# Altium PCB PCB1.PcbDoc
Units mm, origin at the board's own origin, x right, y up, seen from the top; angles counter-clockwise.
Board outline 86 x 56 mm, 2 copper layers (Top Side, Bottom Layer), stack 1.771 mm thick; 1 components, 52 nets, 636 pads, 1 vias.
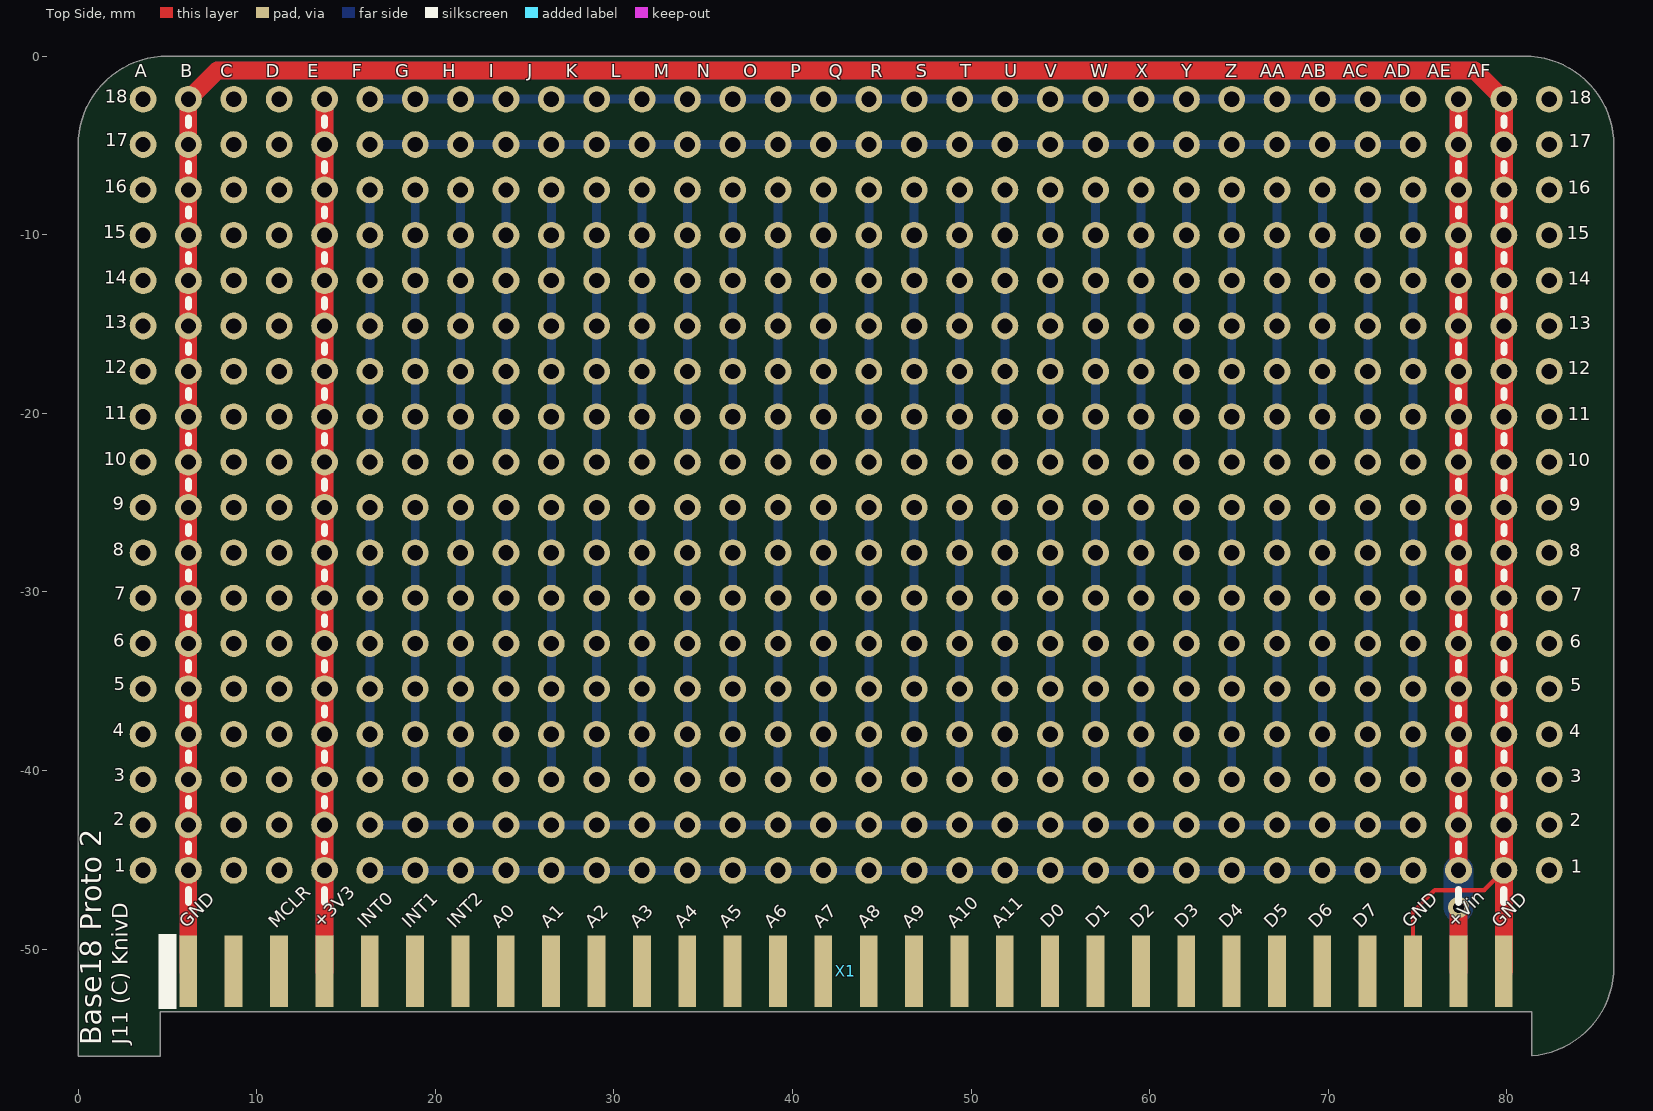
[diagram p0: Top Side view]
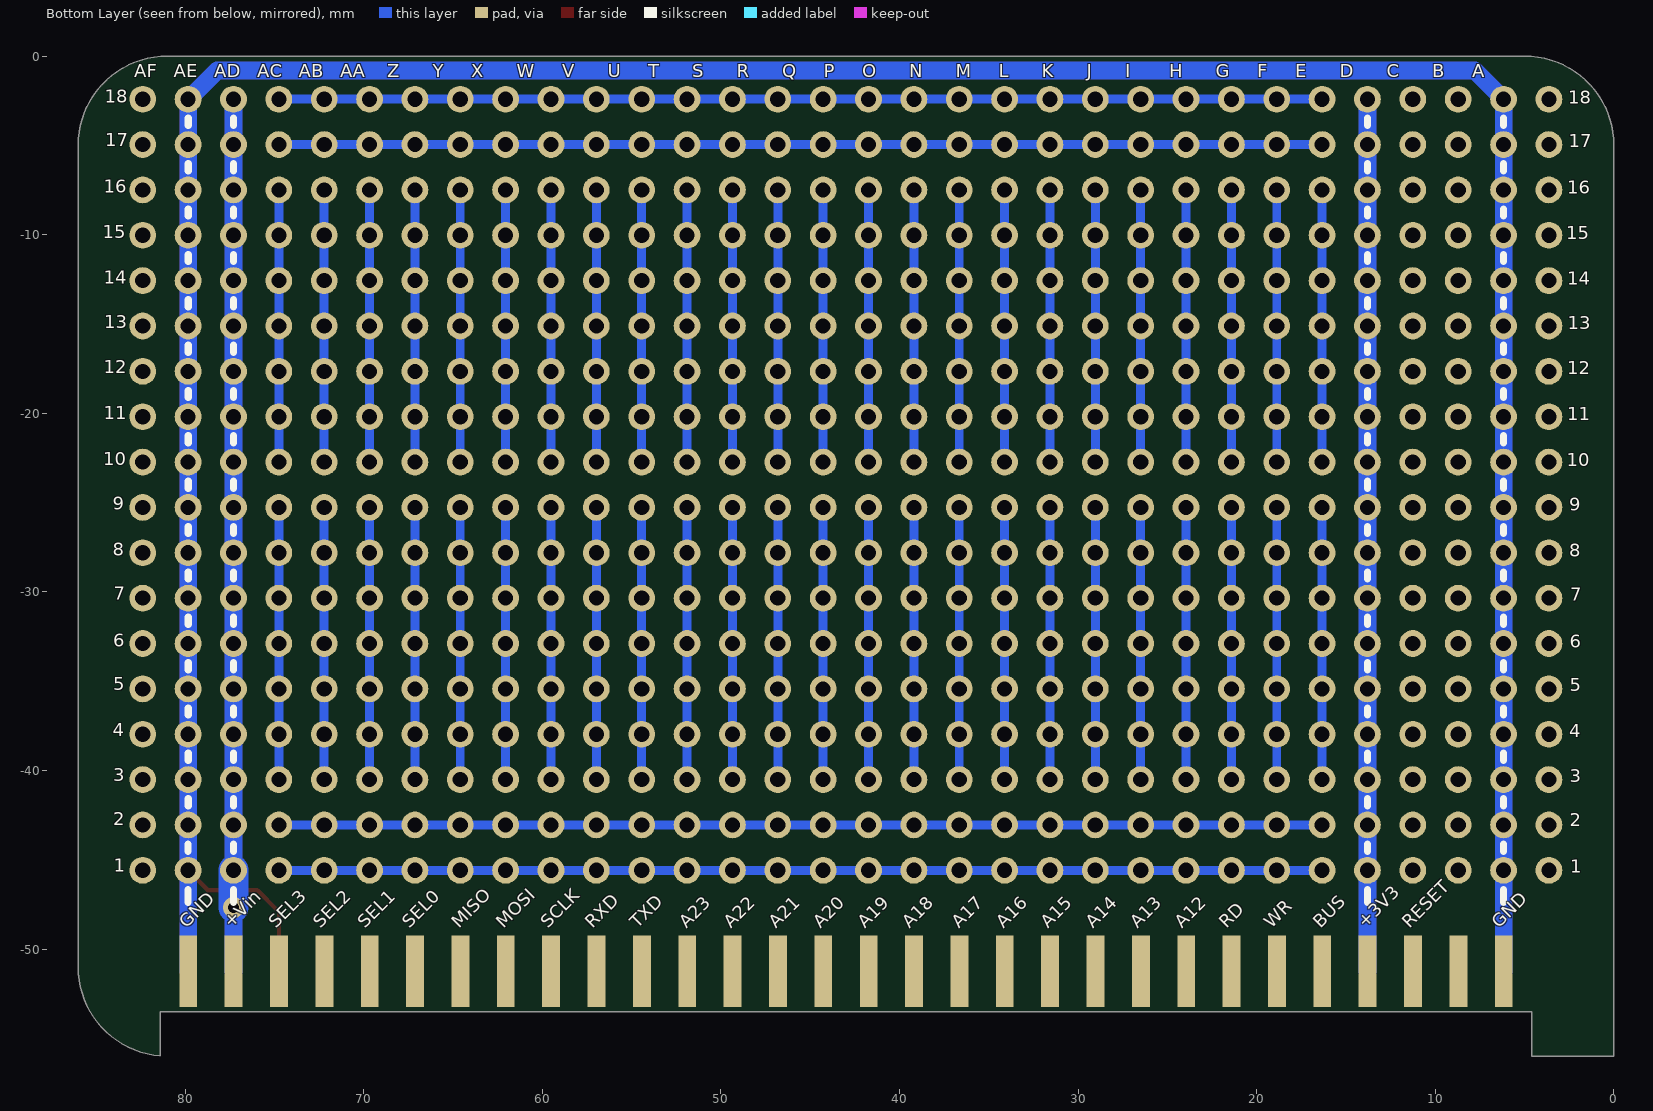
[diagram p1: Bottom Layer view, seen from below]

## Layer stack, top to bottom
Top Solder: solder mask 0.0102, Solder Resist, Dk 3.5
Top Side: signal copper 0.0356
Dielectric 1: core 1.7, FR-4, Dk 4.2
Bottom Layer: signal copper 0.0356
Solder Side: solder mask 0.0102, Solder Resist, Dk 3.5

## Board outline
0,-56 0,-5 cw(c5,-5) 5,0 81,0 cw(c81,-5) 86,-5 86,-51 cw(c81,-51) 81.399,-55.984 81.4,-55.984 81.4,-53.5 4.6,-53.5 4.6,-56

## Design rules (kind name [scope] priority, off if disabled: settings)
Clearance Clearance_Pour [IsRegion] p1: gap=0.3 ignorepadtopadclearanceinfootprint=TRUE
Clearance [All] p2: gap=0.2 ignorepadtopadclearanceinfootprint=TRUE
Height [All] p1: minheight=0 maxheight=100 prefheight=12.7
HoleSize [All] p1: absolutevalues=TRUE maxlimit=5 minlimit=0.025 maxpercent=80.000 minpercent=20.000
HoleToHoleClearance [All] p1: gap=0 allowstackedmicrovias=TRUE
MinimumSolderMaskSliver [All] p1: minsoldermaskwidth=0
PolygonConnect [All] p1: thpad.connectstyle=Relief thpad.reliefconductorwidth=0.25 thpad.reliefentries=4 thpad.polygonreliefangle="90 Angle" thpad.airgapwidth=0.25 smdpad.connectstyle=Relief smdpad.reliefconductorwidth=0.25 smdpad.reliefentries=4 smdpad.polygonreliefangle="90 Angle" smdpad.airgapwidth=0.25 via.connectstyle=Direct via.reliefconductorwidth=0.254 via.reliefentries=4 via.polygonreliefangle="45 Angle" via.airgapwidth=0.254
RoutingVias [All] p1: holewidth=0.3 width=0.6 viastyle="Through Hole" minholewidth=0.25 minwidth=0.5 maxholewidth=1.5 maxwidth=3
SilkToSilkClearance [All] p1: silktosilkclearance=-10
SilkToSolderMaskClearance [IsPad] p1: minsilkscreentomaskgap=-10 clearancetoexposedcopper=TRUE
SolderMaskExpansion SolderMaskExpansion_VIA [IsVia] p1: expansion=-0.3 soldermaskfromhole=TRUE
SolderMaskExpansion [All] p2: expansion=0.102
Width [All] p1: maxlimit=10 minlimit=0.2 preferedwidth=0.25
24 further rules are at their usual default settings.

## Components (designator, comment, footprint, x,y, rotation, side; value= is the part's Value field where it differs from the comment)
X1 "TSW-130-07-G-D" DIL60-M-EDGE 43,-50.45 r0 top locked

## Footprints (in the part's own frame and the unit in brackets; to place one, negate y for a bottom-side part, rotate by r counter-clockwise, add the part's x,y. Pads: shape width x height; smd on the part's side, far side on the other; paste and mask are expansions set on the pad)
DIL60-M-EDGE [mm] "DIL60 header soldered as edge connector"
  rect 1x4 smd: 1(-36.83,-0.8) 3(-34.29,-0.8) 5(-31.75,-0.8) 7(-29.21,-0.8) 9(-26.67,-0.8) 11(-24.13,-0.8) 13(-21.59,-0.8) 15(-19.05,-0.8) 17(-16.51,-0.8) 19(-13.97,-0.8) 21(-11.43,-0.8) 23(-8.89,-0.8) 25(-6.35,-0.8) 27(-3.81,-0.8) 29(-1.27,-0.8) 31(1.27,-0.8) 33(3.81,-0.8) 35(6.35,-0.8) 37(8.89,-0.8) 39(11.43,-0.8) 41(13.97,-0.8) 43(16.51,-0.8) 45(19.05,-0.8) 47(21.59,-0.8) 49(24.13,-0.8) 51(26.67,-0.8) 53(29.21,-0.8) 55(31.75,-0.8) 57(34.29,-0.8) 59(36.83,-0.8)
  rect 1x4 smd far side: 2(-36.83,-0.8) 4(-34.29,-0.8) 6(-31.75,-0.8) 8(-29.21,-0.8) 10(-26.67,-0.8) 12(-24.13,-0.8) 14(-21.59,-0.8) 16(-19.05,-0.8) 18(-16.51,-0.8) 20(-13.97,-0.8) 22(-11.43,-0.8) 24(-8.89,-0.8) 26(-6.35,-0.8) 28(-3.81,-0.8) 30(-1.27,-0.8) 32(1.27,-0.8) 34(3.81,-0.8) 36(6.35,-0.8) 38(8.89,-0.8) 40(11.43,-0.8) 42(13.97,-0.8) 44(16.51,-0.8) 46(19.05,-0.8) 48(21.59,-0.8) 50(24.13,-0.8) 52(26.67,-0.8) 54(29.21,-0.8) 56(31.75,-0.8) 58(34.29,-0.8) 60(36.83,-0.8)
  silkscreen extent -38.5,-2.9 -37.5,1.3, body extent -38.1,-10.83 38.1,0.09, height 1.64

## Part data
X1: library part "Connector 2x30", "Dual row, 60-way connector"

## Free pads (board coordinates)
  round 1.5 hole 0.85 unplated: 0(3.64,-45.593) 0(3.64,-43.053) 0(3.64,-40.513) 0(3.64,-37.973) 0(3.64,-35.433) 0(3.64,-32.893) 0(3.64,-30.353) 0(3.64,-27.813) 0(3.64,-25.273) 0(3.64,-22.733) 0(3.64,-20.193) 0(3.64,-17.653) 0(3.64,-15.113) 0(3.64,-12.573) 0(3.64,-10.033) 0(3.64,-7.493) 0(3.64,-4.953) 0(3.64,-2.413) 0(6.18,-45.593) 0(6.18,-43.053) 0(6.18,-40.513) 0(6.18,-37.973) 0(6.18,-35.433) 0(6.18,-32.893) 0(6.18,-30.353) 0(6.18,-27.813) 0(6.18,-25.273) 0(6.18,-22.733) 0(6.18,-20.193) 0(6.18,-17.653) 0(6.18,-15.113) 0(6.18,-12.573) 0(6.18,-10.033) 0(6.18,-7.493) 0(6.18,-4.953) 0(6.18,-2.413) 0(8.72,-45.593) 0(8.72,-43.053) 0(8.72,-40.513) 0(8.72,-37.973) 0(8.72,-35.433) 0(8.72,-32.893) 0(8.72,-30.353) 0(8.72,-27.813) 0(8.72,-25.273) 0(8.72,-22.733) 0(8.72,-20.193) 0(8.72,-17.653) 0(8.72,-15.113) 0(8.72,-12.573) 0(8.72,-10.033) 0(8.72,-7.493) 0(8.72,-4.953) 0(8.72,-2.413) 0(11.26,-45.593) 0(11.26,-43.053) 0(11.26,-40.513) 0(11.26,-37.973) 0(11.26,-35.433) 0(11.26,-32.893) 0(11.26,-30.353) 0(11.26,-27.813) 0(11.26,-25.273) 0(11.26,-22.733) 0(11.26,-20.193) 0(11.26,-17.653) 0(11.26,-15.113) 0(11.26,-12.573) 0(11.26,-10.033) 0(11.26,-7.493) 0(11.26,-4.953) 0(11.26,-2.413) 0(13.8,-45.593) 0(13.8,-43.053) 0(13.8,-40.513) 0(13.8,-37.973) 0(13.8,-35.433) 0(13.8,-32.893) 0(13.8,-30.353) 0(13.8,-27.813) 0(13.8,-25.273) 0(13.8,-22.733) 0(13.8,-20.193) 0(13.8,-17.653) 0(13.8,-15.113) 0(13.8,-12.573) 0(13.8,-10.033) 0(13.8,-7.493) 0(13.8,-4.953) 0(13.8,-2.413) 0(16.34,-45.593) 0(16.34,-43.053) 0(16.34,-40.513) 0(16.34,-37.973) 0(16.34,-35.433) 0(16.34,-32.893) 0(16.34,-30.353) 0(16.34,-27.813) 0(16.34,-25.273) 0(16.34,-22.733) 0(16.34,-20.193) 0(16.34,-17.653) 0(16.34,-15.113) 0(16.34,-12.573) 0(16.34,-10.033) 0(16.34,-7.493) 0(16.34,-4.953) 0(16.34,-2.413) 0(18.88,-45.593) 0(18.88,-43.053) 0(18.88,-40.513) 0(18.88,-37.973) 0(18.88,-35.433) 0(18.88,-32.893) 0(18.88,-30.353) 0(18.88,-27.813) 0(18.88,-25.273) 0(18.88,-22.733) 0(18.88,-20.193) 0(18.88,-17.653) 0(18.88,-15.113) 0(18.88,-12.573) 0(18.88,-10.033) 0(18.88,-7.493) 0(18.88,-4.953) 0(18.88,-2.413) 0(21.42,-45.593) 0(21.42,-43.053) 0(21.42,-40.513) 0(21.42,-37.973) 0(21.42,-35.433) 0(21.42,-32.893) 0(21.42,-30.353) 0(21.42,-27.813) 0(21.42,-25.273) 0(21.42,-22.733) 0(21.42,-20.193) 0(21.42,-17.653) 0(21.42,-15.113) 0(21.42,-12.573) 0(21.42,-10.033) 0(21.42,-7.493) 0(21.42,-4.953) 0(21.42,-2.413) 0(23.96,-45.593) 0(23.96,-43.053) 0(23.96,-40.513) 0(23.96,-37.973) 0(23.96,-35.433) 0(23.96,-32.893) 0(23.96,-30.353) 0(23.96,-27.813) 0(23.96,-25.273) 0(23.96,-22.733) 0(23.96,-20.193) 0(23.96,-17.653) 0(23.96,-15.113) 0(23.96,-12.573) 0(23.96,-10.033) 0(23.96,-7.493) 0(23.96,-4.953) 0(23.96,-2.413) 0(26.5,-45.593) 0(26.5,-43.053) 0(26.5,-40.513) 0(26.5,-37.973) 0(26.5,-35.433) 0(26.5,-32.893) 0(26.5,-30.353) 0(26.5,-27.813) 0(26.5,-25.273) 0(26.5,-22.733) 0(26.5,-20.193) 0(26.5,-17.653) 0(26.5,-15.113) 0(26.5,-12.573) 0(26.5,-10.033) 0(26.5,-7.493) 0(26.5,-4.953) 0(26.5,-2.413) 0(29.04,-45.593) 0(29.04,-43.053) 0(29.04,-40.513) 0(29.04,-37.973) 0(29.04,-35.433) 0(29.04,-32.893) 0(29.04,-30.353) 0(29.04,-27.813) 0(29.04,-25.273) 0(29.04,-22.733) 0(29.04,-20.193) 0(29.04,-17.653) 0(29.04,-15.113) 0(29.04,-12.573) 0(29.04,-10.033) 0(29.04,-7.493) 0(29.04,-4.953) 0(29.04,-2.413) 0(31.58,-45.593) 0(31.58,-43.053) 0(31.58,-40.513) 0(31.58,-37.973) 0(31.58,-35.433) 0(31.58,-32.893) 0(31.58,-30.353) 0(31.58,-27.813) 0(31.58,-25.273) 0(31.58,-22.733) 0(31.58,-20.193) 0(31.58,-17.653) 0(31.58,-15.113) 0(31.58,-12.573) 0(31.58,-10.033) 0(31.58,-7.493) 0(31.58,-4.953) 0(31.58,-2.413) 0(34.12,-45.593) 0(34.12,-43.053) 0(34.12,-40.513) 0(34.12,-37.973) 0(34.12,-35.433) 0(34.12,-32.893) 0(34.12,-30.353) 0(34.12,-27.813) 0(34.12,-25.273) 0(34.12,-22.733) 0(34.12,-20.193) 0(34.12,-17.653) 0(34.12,-15.113) 0(34.12,-12.573) 0(34.12,-10.033) 0(34.12,-7.493) 0(34.12,-4.953) 0(34.12,-2.413) 0(36.66,-45.593) 0(36.66,-43.053) 0(36.66,-40.513) 0(36.66,-37.973) 0(36.66,-35.433) 0(36.66,-32.893) 0(36.66,-30.353) 0(36.66,-27.813) 0(36.66,-25.273) 0(36.66,-22.733) 0(36.66,-20.193) 0(36.66,-17.653) 0(36.66,-15.113) 0(36.66,-12.573) 0(36.66,-10.033) 0(36.66,-7.493) 0(36.66,-4.953) 0(36.66,-2.413) 0(39.2,-45.593) 0(39.2,-43.053) 0(39.2,-40.513) 0(39.2,-37.973) 0(39.2,-35.433) 0(39.2,-32.893) 0(39.2,-30.353) 0(39.2,-27.813) 0(39.2,-25.273) 0(39.2,-22.733) 0(39.2,-20.193) 0(39.2,-17.653) 0(39.2,-15.113) 0(39.2,-12.573) 0(39.2,-10.033) 0(39.2,-7.493) 0(39.2,-4.953) 0(39.2,-2.413) 0(41.74,-45.593) 0(41.74,-43.053) 0(41.74,-40.513) 0(41.74,-37.973) 0(41.74,-35.433) 0(41.74,-32.893) 0(41.74,-30.353) 0(41.74,-27.813) 0(41.74,-25.273) 0(41.74,-22.733) 0(41.74,-20.193) 0(41.74,-17.653) 0(41.74,-15.113) 0(41.74,-12.573) 0(41.74,-10.033) 0(41.74,-7.493) 0(41.74,-4.953) 0(41.74,-2.413) 0(44.28,-45.593) 0(44.28,-43.053) 0(44.28,-40.513) 0(44.28,-37.973) 0(44.28,-35.433) 0(44.28,-32.893) 0(44.28,-30.353) 0(44.28,-27.813) 0(44.28,-25.273) 0(44.28,-22.733) 0(44.28,-20.193) 0(44.28,-17.653) 0(44.28,-15.113) 0(44.28,-12.573) 0(44.28,-10.033) 0(44.28,-7.493) 0(44.28,-4.953) 0(44.28,-2.413) 0(46.82,-45.593) 0(46.82,-43.053) 0(46.82,-40.513) 0(46.82,-37.973) 0(46.82,-35.433) 0(46.82,-32.893) 0(46.82,-30.353) 0(46.82,-27.813) 0(46.82,-25.273) 0(46.82,-22.733) 0(46.82,-20.193) 0(46.82,-17.653) 0(46.82,-15.113) 0(46.82,-12.573) 0(46.82,-10.033) 0(46.82,-7.493) 0(46.82,-4.953) 0(46.82,-2.413) 0(49.36,-45.593) 0(49.36,-43.053) 0(49.36,-40.513) 0(49.36,-37.973) 0(49.36,-35.433) 0(49.36,-32.893) 0(49.36,-30.353) 0(49.36,-27.813) 0(49.36,-25.273) 0(49.36,-22.733) 0(49.36,-20.193) 0(49.36,-17.653) 0(49.36,-15.113) 0(49.36,-12.573) 0(49.36,-10.033) 0(49.36,-7.493) 0(49.36,-4.953) 0(49.36,-2.413) 0(51.9,-45.593) 0(51.9,-43.053) 0(51.9,-40.513) 0(51.9,-37.973) 0(51.9,-35.433) 0(51.9,-32.893) 0(51.9,-30.353) 0(51.9,-27.813) 0(51.9,-25.273) 0(51.9,-22.733) 0(51.9,-20.193) 0(51.9,-17.653) 0(51.9,-15.113) 0(51.9,-12.573) 0(51.9,-10.033) 0(51.9,-7.493) 0(51.9,-4.953) 0(51.9,-2.413) 0(54.44,-45.593) 0(54.44,-43.053) 0(54.44,-40.513) 0(54.44,-37.973) 0(54.44,-35.433) 0(54.44,-32.893) 0(54.44,-30.353) 0(54.44,-27.813) 0(54.44,-25.273) 0(54.44,-22.733) 0(54.44,-20.193) 0(54.44,-17.653) 0(54.44,-15.113) 0(54.44,-12.573) 0(54.44,-10.033) 0(54.44,-7.493) 0(54.44,-4.953) 0(54.44,-2.413) 0(56.98,-45.593) 0(56.98,-43.053) 0(56.98,-40.513) 0(56.98,-37.973) 0(56.98,-35.433) 0(56.98,-32.893) 0(56.98,-30.353) 0(56.98,-27.813) 0(56.98,-25.273) 0(56.98,-22.733) 0(56.98,-20.193) 0(56.98,-17.653) 0(56.98,-15.113) 0(56.98,-12.573) 0(56.98,-10.033) 0(56.98,-7.493) 0(56.98,-4.953) 0(56.98,-2.413) 0(59.52,-45.593) 0(59.52,-43.053) 0(59.52,-40.513) 0(59.52,-37.973) 0(59.52,-35.433) 0(59.52,-32.893) 0(59.52,-30.353) 0(59.52,-27.813) 0(59.52,-25.273) 0(59.52,-22.733) 0(59.52,-20.193) 0(59.52,-17.653) 0(59.52,-15.113) 0(59.52,-12.573) 0(59.52,-10.033) 0(59.52,-7.493) 0(59.52,-4.953) 0(59.52,-2.413) 0(62.06,-45.593) 0(62.06,-43.053) 0(62.06,-40.513) 0(62.06,-37.973) 0(62.06,-35.433) 0(62.06,-32.893) 0(62.06,-30.353) 0(62.06,-27.813) 0(62.06,-25.273) 0(62.06,-22.733) 0(62.06,-20.193) 0(62.06,-17.653) 0(62.06,-15.113) 0(62.06,-12.573) 0(62.06,-10.033) 0(62.06,-7.493) 0(62.06,-4.953) 0(62.06,-2.413) 0(64.6,-45.593) 0(64.6,-43.053) 0(64.6,-40.513) 0(64.6,-37.973) 0(64.6,-35.433) 0(64.6,-32.893) 0(64.6,-30.353) 0(64.6,-27.813) 0(64.6,-25.273) 0(64.6,-22.733) 0(64.6,-20.193) 0(64.6,-17.653) 0(64.6,-15.113) 0(64.6,-12.573) 0(64.6,-10.033) 0(64.6,-7.493) 0(64.6,-4.953) 0(64.6,-2.413) 0(67.14,-45.593) 0(67.14,-43.053) 0(67.14,-40.513) 0(67.14,-37.973) 0(67.14,-35.433) 0(67.14,-32.893) 0(67.14,-30.353) 0(67.14,-27.813) 0(67.14,-25.273) 0(67.14,-22.733) 0(67.14,-20.193) 0(67.14,-17.653) 0(67.14,-15.113) 0(67.14,-12.573) 0(67.14,-10.033) 0(67.14,-7.493) 0(67.14,-4.953) 0(67.14,-2.413) 0(69.68,-45.593) 0(69.68,-43.053) 0(69.68,-40.513) 0(69.68,-37.973) 0(69.68,-35.433) 0(69.68,-32.893) 0(69.68,-30.353) 0(69.68,-27.813) 0(69.68,-25.273) 0(69.68,-22.733) 0(69.68,-20.193) 0(69.68,-17.653) 0(69.68,-15.113) 0(69.68,-12.573) 0(69.68,-10.033) 0(69.68,-7.493) 0(69.68,-4.953) 0(69.68,-2.413) 0(72.22,-45.593) 0(72.22,-43.053) 0(72.22,-40.513) 0(72.22,-37.973) 0(72.22,-35.433) 0(72.22,-32.893) 0(72.22,-30.353) 0(72.22,-27.813) 0(72.22,-25.273) 0(72.22,-22.733) 0(72.22,-20.193) 0(72.22,-17.653) 0(72.22,-15.113) 0(72.22,-12.573) 0(72.22,-10.033) 0(72.22,-7.493) 0(72.22,-4.953) 0(72.22,-2.413) 0(74.76,-45.593) 0(74.76,-43.053) 0(74.76,-40.513) 0(74.76,-37.973) 0(74.76,-35.433) 0(74.76,-32.893) 0(74.76,-30.353) 0(74.76,-27.813) 0(74.76,-25.273) 0(74.76,-22.733) 0(74.76,-20.193) 0(74.76,-17.653) 0(74.76,-15.113) 0(74.76,-12.573) 0(74.76,-10.033) 0(74.76,-7.493) 0(74.76,-4.953) 0(74.76,-2.413) 0(77.3,-45.593) 0(77.3,-43.053) 0(77.3,-40.513) 0(77.3,-37.973) 0(77.3,-35.433) 0(77.3,-32.893) 0(77.3,-30.353) 0(77.3,-27.813) 0(77.3,-25.273) 0(77.3,-22.733) 0(77.3,-20.193) 0(77.3,-17.653) 0(77.3,-15.113) 0(77.3,-12.573) 0(77.3,-10.033) 0(77.3,-7.493) 0(77.3,-4.953) 0(77.3,-2.413) 0(79.84,-45.593) 0(79.84,-43.053) 0(79.84,-40.513) 0(79.84,-37.973) 0(79.84,-35.433) 0(79.84,-32.893) 0(79.84,-30.353) 0(79.84,-27.813) 0(79.84,-25.273) 0(79.84,-22.733) 0(79.84,-20.193) 0(79.84,-17.653) 0(79.84,-15.113) 0(79.84,-12.573) 0(79.84,-10.033) 0(79.84,-7.493) 0(79.84,-4.953) 0(79.84,-2.413) 0(82.38,-45.593) 0(82.38,-43.053) 0(82.38,-40.513) 0(82.38,-37.973) 0(82.38,-35.433) 0(82.38,-32.893) 0(82.38,-30.353) 0(82.38,-27.813) 0(82.38,-25.273) 0(82.38,-22.733) 0(82.38,-20.193) 0(82.38,-17.653) 0(82.38,-15.113) 0(82.38,-12.573) 0(82.38,-10.033) 0(82.38,-7.493) 0(82.38,-4.953) 0(82.38,-2.413)

## Via types
v1: diameter 1.2, hole 0.6, Top Side to Bottom Layer, tented both sides, 1 vias

## Nets (pads, with @x,y where several pads share a name; then routed paths per layer and width w, separated by ;. In a path a pad name is that pad's centre, name@x,y a point inside that pad or via, vN(x,y) a via of type N, cw(c..) or ccw(c..) an arc to the next point about the centre after c; other vN are vias at no path point)
+3V3: pad.0@13.8,-2.413 pad.0@13.8,-4.953 pad.0@13.8,-7.493 pad.0@13.8,-10.033 pad.0@13.8,-12.573 pad.0@13.8,-15.113 pad.0@13.8,-17.653 pad.0@13.8,-20.193 pad.0@13.8,-22.733 pad.0@13.8,-25.273 pad.0@13.8,-27.813 pad.0@13.8,-30.353 pad.0@13.8,-32.893 pad.0@13.8,-35.433 pad.0@13.8,-37.973 pad.0@13.8,-40.513 pad.0@13.8,-43.053 pad.0@13.8,-45.593 X1.7 X1.8 | length 97.7
  Top Side w1: X1.7 13.79,-2.423 pad.0@13.8,-2.413
  Bottom Layer w1: X1.8 13.79,-2.423 pad.0@13.8,-2.413
+Vin: pad.0@77.3,-2.413 pad.0@77.3,-4.953 pad.0@77.3,-7.493 pad.0@77.3,-10.033 pad.0@77.3,-12.573 pad.0@77.3,-15.113 pad.0@77.3,-17.653 pad.0@77.3,-20.193 pad.0@77.3,-22.733 pad.0@77.3,-25.273 pad.0@77.3,-27.813 pad.0@77.3,-30.353 pad.0@77.3,-32.893 pad.0@77.3,-35.433 pad.0@77.3,-37.973 pad.0@77.3,-40.513 pad.0@77.3,-43.053 pad.0@77.3,-45.593 X1.57 X1.58 | length 95.6
  Top Side w1: X1.57 77.3,-51.24 v1(77.3,-47.675) ; pad.0@77.29,-45.593 77.29,-2.423 pad.0@77.3,-2.413
  Bottom Layer w1: X1.58 77.3,-51.24 v1(77.3,-47.675) ; pad.0@77.3,-45.593 77.3,-43.053 77.3,-40.513 77.3,-37.973 77.3,-35.433 77.3,-32.893 77.3,-30.353 77.3,-27.813 77.3,-25.273 77.3,-22.733 77.3,-20.193 77.3,-17.653 77.3,-15.113 77.3,-12.573 77.3,-10.033 77.3,-7.493 77.3,-4.953 pad.0@77.3,-2.413
  Bottom Layer w1.7: v1(77.3,-47.675) pad.0@77.3,-45.593
A00: X1.15
A01: X1.17
A02: X1.19
A03: X1.21
A04: X1.23
A05: X1.25
A06: X1.27
A07: X1.29
A08: X1.31
A09: X1.33
A10: X1.35
A11: X1.37
A12: X1.16
A13: X1.18
A14: X1.20
A15: X1.22
A16: X1.24
A17: X1.26
A18: X1.28
A19: X1.30
A20: X1.32
A21: X1.34
A22: X1.36
A23: X1.38
BUS#: X1.10
DB0: X1.39
DB1: X1.41
DB2: X1.43
DB3: X1.45
DB4: X1.47
DB5: X1.49
DB6: X1.51
DB7: X1.53
GND: pad.0@6.18,-2.413 pad.0@6.18,-4.953 pad.0@6.18,-7.493 pad.0@6.18,-10.033 pad.0@6.18,-12.573 pad.0@6.18,-15.113 pad.0@6.18,-17.653 pad.0@6.18,-20.193 pad.0@6.18,-22.733 pad.0@6.18,-25.273 pad.0@6.18,-27.813 pad.0@6.18,-30.353 pad.0@6.18,-32.893 pad.0@6.18,-35.433 pad.0@6.18,-37.973 pad.0@6.18,-40.513 pad.0@6.18,-43.053 pad.0@6.18,-45.593 pad.0@79.84,-2.413 pad.0@79.84,-4.953 pad.0@79.84,-7.493 pad.0@79.84,-10.033 pad.0@79.84,-12.573 pad.0@79.84,-15.113 pad.0@79.84,-17.653 pad.0@79.84,-20.193 pad.0@79.84,-22.733 pad.0@79.84,-25.273 pad.0@79.84,-27.813 pad.0@79.84,-30.353 pad.0@79.84,-32.893 pad.0@79.84,-35.433 pad.0@79.84,-37.973 pad.0@79.84,-40.513 pad.0@79.84,-43.053 pad.0@79.84,-45.593 X1.1 X1.2 X1.55 X1.59 X1.60 | length 354.7
  Top Side w0.25: X1.55 74.75,-47.925 75.975,-46.7 78.733,-46.7 pad.0@79.84,-45.593
  Top Side w1: X1.1 6.17,-2.423 6.18,-2.413 7.793,-0.8 78.207,-0.8 79.82,-2.413 79.84,-2.413 79.84,-4.953 79.84,-7.493 79.84,-10.033 79.84,-12.573 79.84,-15.113 79.84,-17.653 79.84,-20.193 79.84,-22.733 79.84,-25.273 79.84,-27.813 79.84,-30.353 79.84,-32.893 79.84,-35.433 79.84,-37.973 79.84,-40.513 79.84,-43.053 79.84,-45.593 79.84,-51.24 X1.59
  Bottom Layer w1: X1.2 6.17,-2.423 6.18,-2.413 7.793,-0.8 78.207,-0.8 pad.0@79.83,-2.423 ; X1.60 pad.0@79.83,-2.423 ; pad.0@79.84,-2.413 pad.0@79.83,-2.423
INT0#: X1.9
INT1#: X1.11
INT2#: X1.13
MCLR#: X1.5
MISO: X1.48
MOSI: X1.46
RD#: X1.14
RESET#: X1.6
RXD: X1.42
SCLK: X1.44
SEL0#: X1.50
SEL1#: X1.52
SEL2#: X1.54
SEL3#: X1.56
TXD: X1.40
WR#: X1.12
pads on no net: X1.3 X1.4
copper on no net: | length 965.2
  Bottom Layer w0.5: 16.34,-45.593 74.76,-45.593 ; 16.34,-43.053 74.76,-43.053 ; 16.34,-40.513 16.34,-25.273 ; 16.34,-22.733 16.34,-7.493 ; 16.34,-4.953 74.76,-4.953 ; 16.34,-2.413 74.76,-2.413 ; 18.88,-40.513 18.88,-25.273 ; 18.88,-22.733 18.88,-7.493 ; 21.42,-40.513 21.42,-25.273 ; 21.42,-22.733 21.42,-7.493 ; 23.96,-40.513 23.96,-25.273 ; 23.96,-22.733 23.96,-7.493 ; 26.5,-40.513 26.5,-25.273 ; 26.5,-22.733 26.5,-7.493 ; 29.04,-40.513 29.04,-25.273 ; 29.04,-22.733 29.04,-7.493 ; 31.58,-40.513 31.58,-25.273 ; 31.58,-22.733 31.58,-7.493 ; 34.12,-40.513 34.12,-25.273 ; 34.12,-22.733 34.12,-7.493 ; 36.66,-40.513 36.66,-25.273 ; 36.66,-22.733 36.66,-7.493 ; 39.2,-40.513 39.2,-25.273 ; 39.2,-22.733 39.2,-7.493 ; 41.74,-40.513 41.74,-25.273 ; 41.74,-22.733 41.74,-7.493 ; 44.28,-40.513 44.28,-25.273 ; 44.28,-22.733 44.28,-7.493 ; 46.82,-40.513 46.82,-25.273 ; 46.82,-22.733 46.82,-7.493 ; 49.36,-40.513 49.36,-25.273 ; 49.36,-22.733 49.36,-7.493 ; 51.9,-40.513 51.9,-25.273 ; 51.9,-22.733 51.9,-7.493 ; 54.44,-40.513 54.44,-25.273 ; 54.44,-22.733 54.44,-7.493 ; 56.98,-40.513 56.98,-25.273 ; 56.98,-22.733 56.98,-7.493 ; 59.52,-40.513 59.52,-25.273 ; 59.52,-22.733 59.52,-7.493 ; 62.06,-40.513 62.06,-25.273 ; 62.06,-22.733 62.06,-7.493 ; 64.6,-40.513 64.6,-25.273 ; 64.6,-22.733 64.6,-7.493 ; 67.14,-40.513 67.14,-25.273 ; 67.14,-22.733 67.14,-7.493 ; 69.68,-40.513 69.68,-25.273 ; 69.68,-22.733 69.68,-7.493 ; 72.22,-40.513 72.22,-25.273 ; 72.22,-22.733 72.22,-7.493 ; 74.76,-40.513 74.76,-25.273 ; 74.76,-22.733 74.76,-7.493

## Silkscreen, mask and mechanical layers (free items; w line width, h text height)
Top Overlay:
  lines w0.4: 6.175,-47.4 6.175,-46.675 ; 6.175,-44.525 6.175,-44.125 ; 6.184,-41.981 6.184,-41.581 ; 6.184,-39.441 6.184,-39.041 ; 6.184,-36.901 6.184,-36.501 ; 6.184,-34.361 6.184,-33.961 ; 6.184,-31.821 6.184,-31.421 ; 6.184,-29.281 6.184,-28.881 ; 6.184,-26.741 6.184,-26.341 ; 6.184,-24.201 6.184,-23.801 ; 6.184,-21.661 6.184,-21.261 ; 6.184,-19.121 6.184,-18.721 ; 6.184,-16.581 6.184,-16.181 ; 6.184,-14.041 6.184,-13.641 ; 6.184,-11.501 6.184,-11.101 ; 6.184,-8.961 6.184,-8.561 ; 6.184,-6.421 6.184,-6.021 ; 6.184,-3.881 6.184,-3.481 ; 13.795,-47.4 13.795,-46.675 ; 13.795,-44.525 13.795,-44.125 ; 13.804,-41.981 13.804,-41.581 ; 13.804,-39.441 13.804,-39.041 ; 13.804,-36.901 13.804,-36.501 ; 13.804,-34.361 13.804,-33.961 ; 13.804,-31.821 13.804,-31.421 ; 13.804,-29.281 13.804,-28.881 ; 13.804,-26.741 13.804,-26.341 ; 13.804,-24.201 13.804,-23.801 ; 13.804,-21.661 13.804,-21.261 ; 13.804,-19.121 13.804,-18.721 ; 13.804,-16.581 13.804,-16.181 ; 13.804,-14.041 13.804,-13.641 ; 13.804,-11.501 13.804,-11.101 ; 13.804,-8.961 13.804,-8.561 ; 13.804,-6.421 13.804,-6.021 ; 13.804,-3.881 13.804,-3.481 ; 77.295,-47.4 77.295,-46.675 ; 77.295,-44.525 77.295,-44.125 ; 77.304,-41.981 77.304,-41.581 ; 77.304,-39.441 77.304,-39.041 ; 77.304,-36.901 77.304,-36.501 ; 77.304,-34.361 77.304,-33.961 ; 77.304,-31.821 77.304,-31.421 ; 77.304,-29.281 77.304,-28.881 ; 77.304,-26.741 77.304,-26.341 ; 77.304,-24.201 77.304,-23.801 ; 77.304,-21.661 77.304,-21.261 ; 77.304,-19.121 77.304,-18.721 ; 77.304,-16.581 77.304,-16.181 ; 77.304,-14.041 77.304,-13.641 ; 77.304,-11.501 77.304,-11.101 ; 77.304,-8.961 77.304,-8.561 ; 77.304,-6.421 77.304,-6.021 ; 77.304,-3.881 77.304,-3.481 ; 79.835,-47.4 79.835,-46.675 ; 79.835,-44.525 79.835,-44.125 ; 79.844,-41.981 79.844,-41.581 ; 79.844,-39.441 79.844,-39.041 ; 79.844,-36.901 79.844,-36.501 ; 79.844,-34.361 79.844,-33.961 ; 79.844,-31.821 79.844,-31.421 ; 79.844,-29.281 79.844,-28.881 ; 79.844,-26.741 79.844,-26.341 ; 79.844,-24.201 79.844,-23.801 ; 79.844,-21.661 79.844,-21.261 ; 79.844,-19.121 79.844,-18.721 ; 79.844,-16.581 79.844,-16.181 ; 79.844,-14.041 79.844,-13.641 ; 79.844,-11.501 79.844,-11.101 ; 79.844,-8.961 79.844,-8.561 ; 79.844,-6.421 79.844,-6.021 ; 79.844,-3.881 79.844,-3.481
  text "A      B     C      D     E      F      G      H      I      J      K      L      M     N      O      P     Q     R      S      T      U     V      W     X      Y      Z    AA   AB   AC   AD   AE   AF" at 3.175,-1.425 h1.25
  text "18" at 1.5,-2.85 h1.25
  text "18" at 83.46,-2.907 h1.25
  text "17" at 1.525,-5.3 h1.25
  text "17" at 83.485,-5.357 h1.25
  text "16" at 1.45,-7.9 h1.25
  text "16" at 83.41,-7.957 h1.25
  text "15" at 1.4,-10.45 h1.25
  text "15" at 83.36,-10.507 h1.25
  text "14" at 1.45,-13 h1.25
  text "14" at 83.41,-13.057 h1.25
  text "13" at 1.475,-15.5 h1.25
  text "13" at 83.435,-15.557 h1.25
  text "12" at 1.45,-18 h1.25
  text "12" at 83.41,-18.057 h1.25
  text "11" at 1.45,-20.575 h1.25
  text "11" at 83.41,-20.632 h1.25
  text "10" at 1.425,-23.15 h1.25
  text "10" at 83.385,-23.207 h1.25
  text "9" at 1.95,-25.65 h1.25
  text "9" at 83.51,-25.707 h1.25
  text "8" at 1.95,-28.225 h1.25
  text "8" at 83.51,-28.282 h1.25
  text "7" at 2.025,-30.7 h1.25
  text "7" at 83.585,-30.757 h1.25
  text "6" at 1.975,-33.325 h1.25
  text "6" at 83.535,-33.382 h1.25
  text "5" at 2,-35.775 h1.25
  text "5" at 83.56,-35.832 h1.25
  text "4" at 1.95,-38.325 h1.25
  text "4" at 83.51,-38.382 h1.25
  text "3" at 2,-40.85 h1.25
  text "3" at 83.56,-40.907 h1.25
  text "2" at 1.975,-43.325 h1.25
  text "2" at 83.535,-43.382 h1.25
  text "1" at 2.025,-45.925 h1.25
  text "1" at 83.585,-45.982 h1.25
  text "GND" at 6.25,-49.05 h1.25 r45
  text "MCLR" at 11.25,-49.05 h1.25 r45
  text "+3V3" at 13.75,-49.05 h1.25 r45
  text "INT0" at 16.25,-49.05 h1.25 r45
  text "INT1" at 18.75,-49.05 h1.25 r45
  text "INT2" at 21.25,-49.05 h1.25 r45
  text "A0" at 23.75,-49.05 h1.25 r45
  text "A1" at 26.5,-49.05 h1.25 r45
  text "A2" at 29,-49.05 h1.25 r45
  text "A3" at 31.5,-49.05 h1.25 r45
  text "A4" at 34,-49.05 h1.25 r45
  text "A5" at 36.5,-49.05 h1.25 r45
  text "A6" at 39,-49.05 h1.25 r45
  text "A7" at 41.75,-49.05 h1.25 r45
  text "A8" at 44.25,-49.05 h1.25 r45
  text "A9" at 46.75,-49.05 h1.25 r45
  text "A10" at 49.25,-49.05 h1.25 r45
  text "A11" at 51.75,-49.05 h1.25 r45
  text "D0" at 54.5,-49.05 h1.25 r45
  text "D1" at 57,-49.05 h1.25 r45
  text "D2" at 59.5,-49.05 h1.25 r45
  text "D3" at 62,-49.05 h1.25 r45
  text "D4" at 64.5,-49.05 h1.25 r45
  text "D5" at 67,-49.05 h1.25 r45
  text "D6" at 69.5,-49.05 h1.25 r45
  text "D7" at 72,-49.05 h1.25 r45
  text "GND" at 74.75,-49.05 h1.25 r45
  text "+Vin" at 77.25,-49.05 h1.25 r45
  text "GND" at 79.75,-49.05 h1.25 r45
  text "J11 (C) KnivD" at 3.075,-55.375 h1.5 r90
  text "Base18 Proto 2" at 1.7,-55.4 h2 r90
Bottom Overlay:
  lines w0.4: 6.175,-41.981 6.175,-41.581 ; 6.175,-39.441 6.175,-39.041 ; 6.175,-36.901 6.175,-36.501 ; 6.175,-34.361 6.175,-33.961 ; 6.175,-31.821 6.175,-31.421 ; 6.175,-29.281 6.175,-28.881 ; 6.175,-26.741 6.175,-26.341 ; 6.175,-24.201 6.175,-23.801 ; 6.175,-21.661 6.175,-21.261 ; 6.175,-19.121 6.175,-18.721 ; 6.175,-16.581 6.175,-16.181 ; 6.175,-14.041 6.175,-13.641 ; 6.175,-11.501 6.175,-11.101 ; 6.175,-8.961 6.175,-8.561 ; 6.175,-6.421 6.175,-6.021 ; 6.175,-3.881 6.175,-3.481 ; 6.184,-47.4 6.184,-46.675 ; 6.184,-44.525 6.184,-44.125 ; 13.795,-41.981 13.795,-41.581 ; 13.795,-39.441 13.795,-39.041 ; 13.795,-36.901 13.795,-36.501 ; 13.795,-34.361 13.795,-33.961 ; 13.795,-31.821 13.795,-31.421 ; 13.795,-29.281 13.795,-28.881 ; 13.795,-26.741 13.795,-26.341 ; 13.795,-24.201 13.795,-23.801 ; 13.795,-21.661 13.795,-21.261 ; 13.795,-19.121 13.795,-18.721 ; 13.795,-16.581 13.795,-16.181 ; 13.795,-14.041 13.795,-13.641 ; 13.795,-11.501 13.795,-11.101 ; 13.795,-8.961 13.795,-8.561 ; 13.795,-6.421 13.795,-6.021 ; 13.795,-3.881 13.795,-3.481 ; 13.804,-47.4 13.804,-46.675 ; 13.804,-44.525 13.804,-44.125 ; 77.295,-41.981 77.295,-41.581 ; 77.295,-39.441 77.295,-39.041 ; 77.295,-36.901 77.295,-36.501 ; 77.295,-34.361 77.295,-33.961 ; 77.295,-31.821 77.295,-31.421 ; 77.295,-29.281 77.295,-28.881 ; 77.295,-26.741 77.295,-26.341 ; 77.295,-24.201 77.295,-23.801 ; 77.295,-21.661 77.295,-21.261 ; 77.295,-19.121 77.295,-18.721 ; 77.295,-16.581 77.295,-16.181 ; 77.295,-14.041 77.295,-13.641 ; 77.295,-11.501 77.295,-11.101 ; 77.295,-8.961 77.295,-8.561 ; 77.295,-6.421 77.295,-6.021 ; 77.295,-3.881 77.295,-3.481 ; 77.304,-47.4 77.304,-46.675 ; 77.304,-44.525 77.304,-44.125 ; 79.835,-41.981 79.835,-41.581 ; 79.835,-39.441 79.835,-39.041 ; 79.835,-36.901 79.835,-36.501 ; 79.835,-34.361 79.835,-33.961 ; 79.835,-31.821 79.835,-31.421 ; 79.835,-29.281 79.835,-28.881 ; 79.835,-26.741 79.835,-26.341 ; 79.835,-24.201 79.835,-23.801 ; 79.835,-21.661 79.835,-21.261 ; 79.835,-19.121 79.835,-18.721 ; 79.835,-16.581 79.835,-16.181 ; 79.835,-14.041 79.835,-13.641 ; 79.835,-11.501 79.835,-11.101 ; 79.835,-8.961 79.835,-8.561 ; 79.835,-6.421 79.835,-6.021 ; 79.835,-3.881 79.835,-3.481 ; 79.844,-47.4 79.844,-46.675 ; 79.844,-44.525 79.844,-44.125
  text "AF   AE   AD   AC   AB   AA    Z      Y     X      W     V      U     T      S      R      Q     P     O      N      M     L      K      J      I       H      G     F     E      D      C      B     A" at 82.844,-1.425 h1.25
  text "18" at 84.519,-2.85 h1.25
  text "18" at 2.559,-2.907 h1.25
  text "17" at 84.494,-5.3 h1.25
  text "17" at 2.534,-5.357 h1.25
  text "16" at 84.569,-7.9 h1.25
  text "16" at 2.609,-7.957 h1.25
  text "15" at 84.619,-10.45 h1.25
  text "15" at 2.659,-10.507 h1.25
  text "14" at 84.569,-13 h1.25
  text "14" at 2.609,-13.057 h1.25
  text "13" at 84.544,-15.5 h1.25
  text "13" at 2.584,-15.557 h1.25
  text "12" at 84.569,-18 h1.25
  text "12" at 2.609,-18.057 h1.25
  text "11" at 84.569,-20.575 h1.25
  text "11" at 2.609,-20.632 h1.25
  text "10" at 84.594,-23.15 h1.25
  text "10" at 2.634,-23.207 h1.25
  text "9" at 84.069,-25.65 h1.25
  text "9" at 2.509,-25.707 h1.25
  text "8" at 84.069,-28.225 h1.25
  text "8" at 2.509,-28.282 h1.25
  text "7" at 83.994,-30.7 h1.25
  text "7" at 2.434,-30.757 h1.25
  text "6" at 84.044,-33.325 h1.25
  text "6" at 2.484,-33.382 h1.25
  text "5" at 84.019,-35.775 h1.25
  text "5" at 2.459,-35.832 h1.25
  text "4" at 84.069,-38.325 h1.25
  text "4" at 2.509,-38.382 h1.25
  text "3" at 84.019,-40.85 h1.25
  text "3" at 2.459,-40.907 h1.25
  text "2" at 84.044,-43.325 h1.25
  text "2" at 2.484,-43.382 h1.25
  text "1" at 83.994,-45.925 h1.25
  text "1" at 2.434,-45.982 h1.25
  text "GND" at 6.25,-49.05 h1.25 r315
  text "RESET" at 11.25,-49.05 h1.25 r315
  text "+3V3" at 13.75,-49.05 h1.25 r315
  text "BUS" at 16.25,-49.05 h1.25 r315
  text "WR" at 19,-49.05 h1.25 r315
  text "RD" at 21.5,-49.05 h1.25 r315
  text "A12" at 24,-49.05 h1.25 r315
  text "A13" at 26.5,-49.05 h1.25 r315
  text "A14" at 29,-49.05 h1.25 r315
  text "A15" at 31.5,-49.05 h1.25 r315
  text "A16" at 34,-49.05 h1.25 r315
  text "A17" at 36.5,-49.05 h1.25 r315
  text "A18" at 39.25,-49.05 h1.25 r315
  text "A19" at 41.75,-49.05 h1.25 r315
  text "A20" at 44.25,-49.05 h1.25 r315
  text "A21" at 46.75,-49.05 h1.25 r315
  text "A22" at 49.25,-49.05 h1.25 r315
  text "A23" at 51.75,-49.05 h1.25 r315
  text "TXD" at 54.5,-49.05 h1.25 r315
  text "RXD" at 57,-49.05 h1.25 r315
  text "SCLK" at 59.5,-49.05 h1.25 r315
  text "MOSI" at 62,-49.05 h1.25 r315
  text "MISO" at 64.5,-49.05 h1.25 r315
  text "SEL0" at 67.25,-49.05 h1.25 r315
  text "SEL1" at 69.75,-49.05 h1.25 r315
  text "SEL2" at 72.25,-49.05 h1.25 r315
  text "SEL3" at 74.75,-49.05 h1.25 r315
  text "+Vin" at 77.25,-49.05 h1.25 r315
  text "GND" at 79.75,-49.05 h1.25 r315
Mechanical 1:
  lines w0.4: 81.399,-55.984 ccw(c81,-51) 86,-51 86,-5 ccw(c81,-5) 81,0 5,0 ccw(c5,-5) 0,-5 0,-56 4.6,-56 4.6,-53.5 81.4,-53.5 81.4,-55.984
Drill Drawing:
  text "PCB parameters: HASL, FR-4, 1.8mm / 1oz, green soldermask, white overlay" at 7.5,-69 h2